# EAGLE board 12xHalfBridge (EAGLE 6.4)

Size 50.8 x 34.29 mm. Coordinates in mm from the lower left corner, seen from the top.
Outline: 0,34.29 0,0 50.8,0 50.8,34.29 0,34.29
Copper layers (1*16): Top 0.0356mm / dielectric 1.5011mm / Bottom 0.0356mm
Design rules "LaenPCBOrder": minimum track width 6mil, minimum drill 13mil, track to track 6mil, track to pad 6mil, pad to pad 6mil, via to via 6mil, smd to smd 6mil, copper to edge 15mil, drill to drill 6mil, minimum pad ring 7mil, minimum via ring 7mil, stop-mask expansion 4mil, vias tented up to drill 0mil, thermal gap 10mil

## Footprints (pad centres in the part's own frame; a part is rotated, then mirrored left to right if it is on the bottom)
TO220V = drill 1.016 long: 1 -2.54,-2.54; 2 0,-2.54; 3 2.54,-2.54
1,6/0,8 = drill 0.813 pad 1.6 octagon: 1 0,0
2,8 = hole 2.8: 0,0

## Placement (x,y rotation side)
E$1  [TO220V]  8.51,21.59 0 top
E$2  [TO220V]  19.68,21.59 0 top
E$3  [1,6/0,8]  12.7,32.51 0 top
E$4  [TO220V]  30.86,21.59 0 top
E$5  [TO220V]  42.04,21.59 0 top
E$6  [TO220V]  8.51,17.02 0 top
E$7  [TO220V]  19.68,17.02 0 top
E$8  [1,6/0,8]  45.72,32.51 0 top
E$9  [TO220V]  30.86,17.02 0 top
E$10  [TO220V]  12.32,30.73 0 top
E$11  [TO220V]  42.04,17.02 0 top
E$12  [TO220V]  23.5,30.73 0 top
E$13  [TO220V]  4.95,12.45 0 top
E$14  [TO220V]  34.67,30.73 0 top
E$15  [TO220V]  45.85,30.73 0 top
E$16  [TO220V]  16.13,12.45 0 top
E$17  [TO220V]  12.32,26.16 0 top
E$18  [TO220V]  23.5,26.16 0 top
E$19  [TO220V]  34.67,26.16 0 top
E$20  [TO220V]  45.85,26.16 0 top
E$21  [TO220V]  27.3,12.45 0 top
E$22  [TO220V]  38.48,12.45 0 top
E$23  [TO220V]  4.95,7.87 0 top
E$24  [TO220V]  16.13,7.87 0 top
E$25  [TO220V]  27.3,7.87 0 top
E$26  [1,6/0,8]  5.08,1.78 0 top
E$27  [1,6/0,8]  38.1,1.78 0 top
E$29  [TO220V]  38.48,7.87 0 top
E$30  [1,6/0,8]  17.78,32.51 0 top
E$31  [1,6/0,8]  15.24,32.51 0 top
E$32  [1,6/0,8]  22.86,32.51 0 top
E$38  [1,6/0,8]  20.32,32.51 0 top
E$39  [1,6/0,8]  27.94,32.51 0 top
E$40  [2,8]  5.08,29.21 0 top
E$41  [1,6/0,8]  25.4,32.51 0 top
E$42  [2,8]  45.72,5.08 0 top
E$43  [1,6/0,8]  33.02,32.51 0 top
E$44  [1,6/0,8]  30.48,32.51 0 top
E$45  [1,6/0,8]  38.1,32.51 0 top
E$46  [1,6/0,8]  35.56,32.51 0 top
E$47  [1,6/0,8]  43.18,32.51 0 top
E$48  [1,6/0,8]  40.64,32.51 0 top
E$49  [1,6/0,8]  49.53,20.57 0 top
E$50  [1,6/0,8]  49.53,18.03 0 top
E$51  [1,6/0,8]  49.53,15.49 0 top
E$52  [1,6/0,8]  49.53,12.95 0 top
E$53  [1,6/0,8]  49.53,10.41 0 top
E$54  [1,6/0,8]  49.53,7.87 0 top
E$55  [1,6/0,8]  1.27,26.16 0 top
E$56  [1,6/0,8]  1.27,23.62 0 top
E$57  [1,6/0,8]  1.27,21.08 0 top
E$58  [1,6/0,8]  1.27,18.54 0 top
E$59  [1,6/0,8]  1.27,16 0 top
E$60  [1,6/0,8]  1.27,13.46 0 top
E$61  [1,6/0,8]  10.16,1.78 0 top
E$62  [1,6/0,8]  7.62,1.78 0 top
E$63  [1,6/0,8]  15.24,1.78 0 top
E$64  [1,6/0,8]  12.7,1.78 0 top
E$65  [1,6/0,8]  20.32,1.78 0 top
E$66  [1,6/0,8]  17.78,1.78 0 top
E$67  [1,6/0,8]  25.4,1.78 0 top
E$68  [1,6/0,8]  22.86,1.78 0 top
E$69  [1,6/0,8]  30.48,1.78 0 top
E$70  [1,6/0,8]  27.94,1.78 0 top
E$71  [1,6/0,8]  35.56,1.78 0 top
E$72  [1,6/0,8]  33.02,1.78 0 top

## Library data of the parts
E$1 E$2 E$4-E$7 E$9-E$25 E$29 = transistor-pnp
E$3 E$8 E$26 E$27 E$30-E$32 E$38 E$39 E$41 E$43-E$72 = wirepad
E$40 E$42 = holes

## Nets
S$1: E$17.1 E$30.1
S$2: E$10.1 E$31.1
S$3: E$12.1 E$32.1
S$4: E$2.1 E$39.1
S$5: E$19.1 E$43.1
S$6: E$15.1 E$45.1
S$7: E$5.1 E$47.1
S$8: E$9.2 E$14.3 E$49.1
S$9: E$19.3 E$21.2 E$50.1
S$10: E$4.3 E$25.2 E$51.1
S$11: E$11.2 E$15.3 E$52.1
S$12: E$20.3 E$22.2 E$53.1
S$13: E$5.3 E$29.2 E$54.1
S$14: E$6.2 E$10.3 E$55.1
S$15: E$13.2 E$17.3 E$56.1
S$16: E$1.1 E$38.1
S$17: E$1.3 E$23.2 E$57.1
S$18: E$18.1 E$41.1
S$19: E$7.2 E$12.3 E$58.1
S$20: E$6.1 E$62.1
S$21: E$16.2 E$18.3 E$59.1
S$22: E$2.3 E$24.2 E$60.1
S$23: E$13.1 E$61.1
S$24: E$7.1 E$63.1
S$25: E$24.1 E$65.1
S$26: E$21.1 E$67.1
S$27: E$11.1 E$69.1
S$28: E$29.1 E$71.1
S$29: E$23.1 E$64.1
S$30: E$16.1 E$66.1
S$31: E$9.1 E$68.1
S$32: E$25.1 E$70.1
S$33: E$22.1 E$72.1
S$34: E$14.1 E$44.1
S$35: E$4.1 E$46.1
S$36: E$20.1 E$48.1
S$37: E$1.2 E$2.2 E$3.1 E$4.2 E$5.2 E$8.1 E$10.2 E$12.2 E$14.2 E$15.2 E$17.2 E$18.2 E$19.2 E$20.2
S$38: E$6.3 E$7.3 E$9.3 E$11.3 E$13.3 E$16.3 E$21.3 E$22.3 E$23.3 E$24.3 E$25.3 E$26.1 E$27.1 E$29.3

## Tracks (layer width: path | path; a pad name or v marks a point on that pad's centre or on a via)
S$1  (1 unrouted)
S$2  (1 unrouted)
S$3  (1 unrouted)
S$4  (1 unrouted)
S$5  (1 unrouted)
S$6  (1 unrouted)
S$7  (1 unrouted)
S$8  (2 unrouted)
S$9  (2 unrouted)
S$10  (2 unrouted)
S$11  (2 unrouted)
S$12  (2 unrouted)
S$13  (2 unrouted)
S$14  (2 unrouted)
S$15  (2 unrouted)
S$16  (1 unrouted)
S$17  (2 unrouted)
S$18  (1 unrouted)
S$19  (2 unrouted)
S$20  (1 unrouted)
S$21  (2 unrouted)
S$22  (2 unrouted)
S$23  (1 unrouted)
S$24  (1 unrouted)
S$25  (1 unrouted)
S$26  (1 unrouted)
S$27  (1 unrouted)
S$28  (1 unrouted)
S$29  (1 unrouted)
S$30  (1 unrouted)
S$31  (1 unrouted)
S$32  (1 unrouted)
S$33  (1 unrouted)
S$34  (1 unrouted)
S$35  (1 unrouted)
S$36  (1 unrouted)
S$37  (13 unrouted)
S$38  (13 unrouted)

## Text on the board
tNames: 12x Half Bridge | VDD | H1 | H2 | H3 | H4 | H5 | H6 | H7 | H8 | H9 | H10 | H11 | H12 | VDD | O1 | O2 | O3 | O4 | O7 | O5 | O8 | O6 | O9 | O10 | O11 | O12 | Brent M. Spell | GND | L1 | L2 | L3 | L4 | L5 | L6 | L7 | L8 | L9 | L10 | L11 | L12 | GND